# EAGLE board limitSwitch (EAGLE 9.1.3)
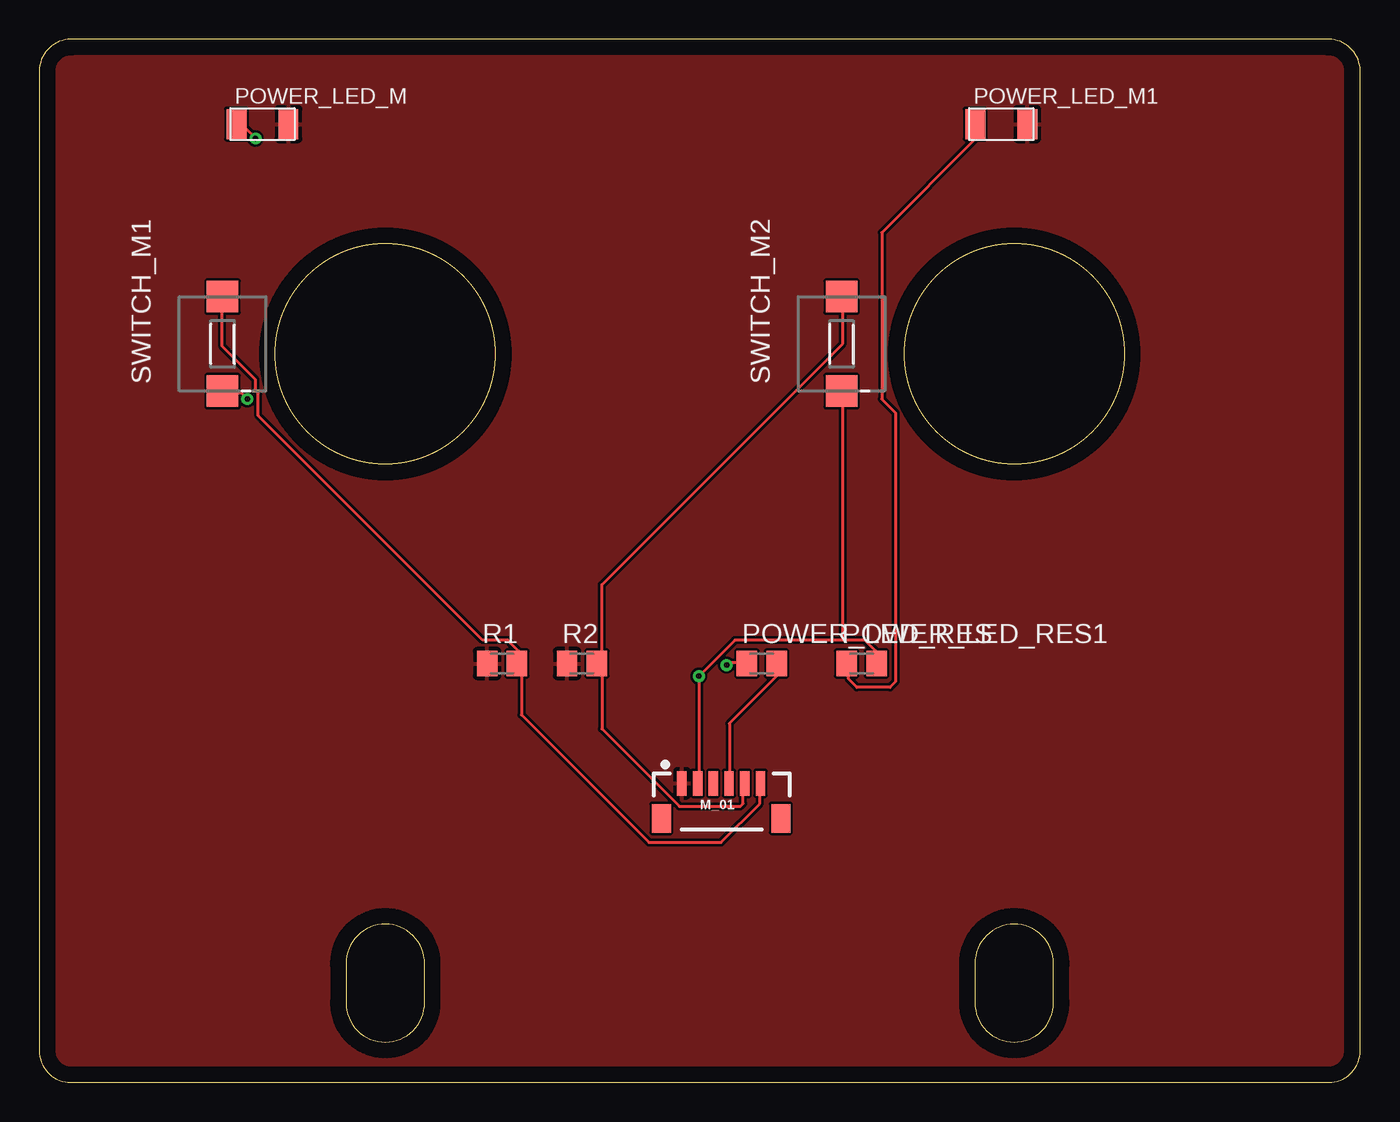
[diagram p0: board, top side]
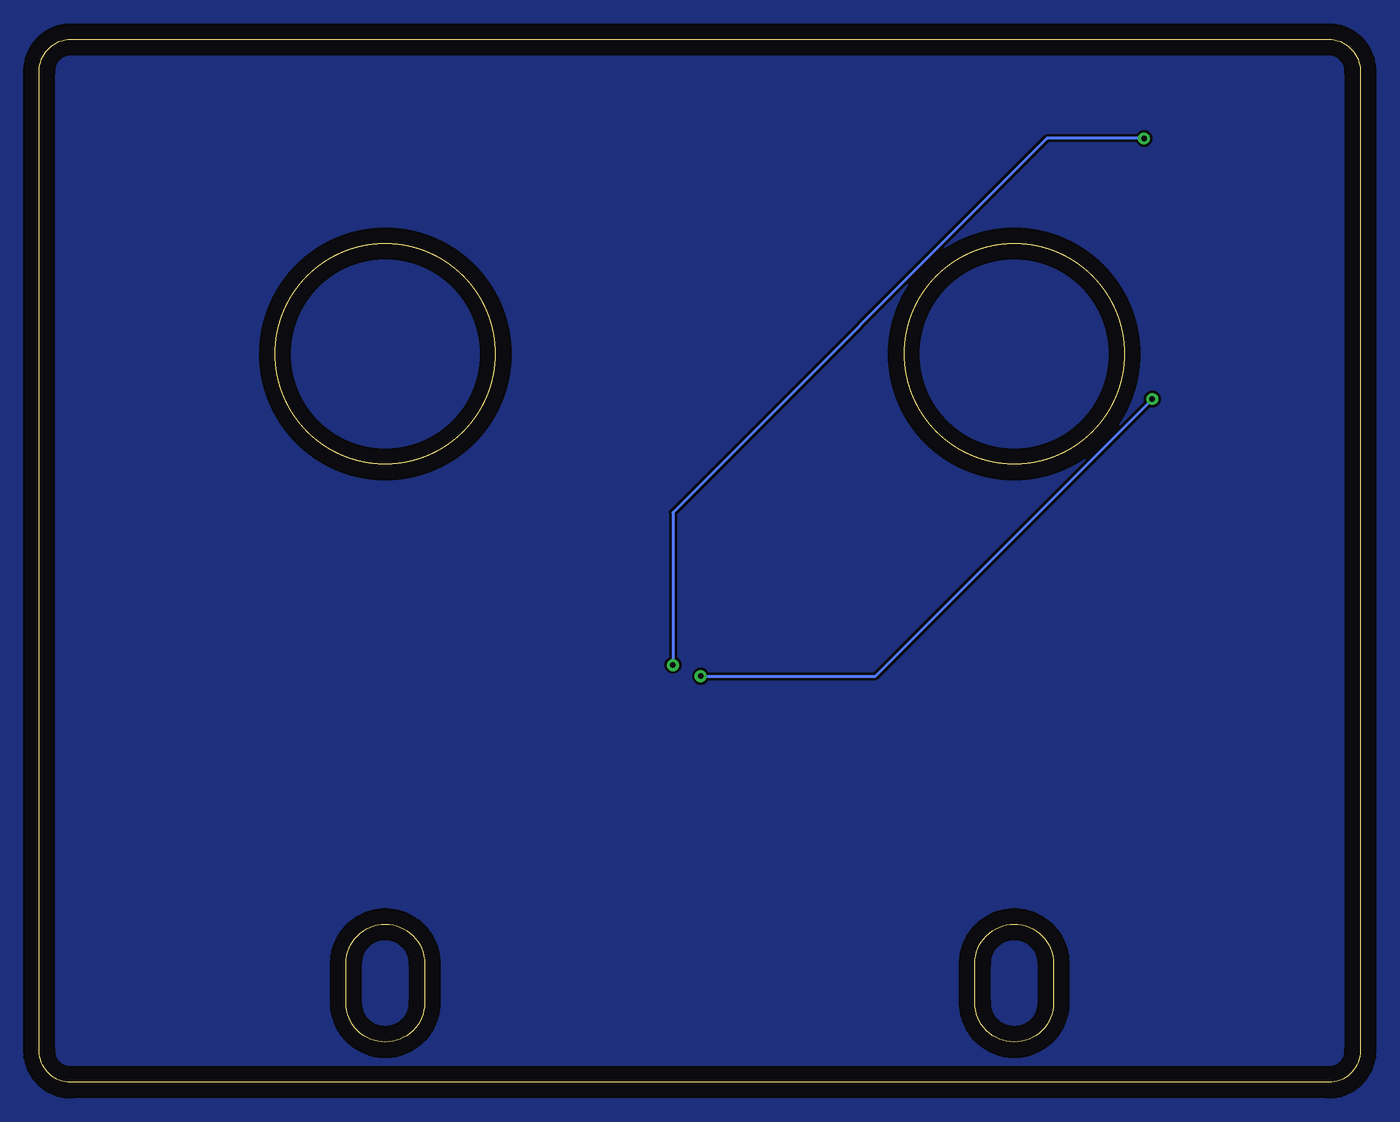
[diagram p1: board, bottom side, seen from below]

Size 84 x 66.31 mm. Coordinates in mm from the lower left corner, seen from the top.
Outline: 84,2 84,64.31 arc90 82,66.31 2,66.31 arc90 0,64.31 0,2 arc90 2,0 82,0 arc90 84,2
Outline: 24.5,5.07 24.5,7.56 arc180 19.5,7.56 19.5,5.07 arc180 24.5,5.07
Outline: 64.5,5.07 64.5,7.56 arc180 59.5,7.56 59.5,5.07 arc180 64.5,5.07
Outline: circle at 22,46.31 radius 7
Outline: circle at 62,46.31 radius 7
Copper layers (1*16): Top 0.035mm / dielectric 1.5mm / Bottom 0.035mm
Design rules "default": minimum track width 6mil, minimum drill 0.35mm, track to track 6mil, track to pad 6mil, pad to pad 6mil, via to via 6mil, smd to smd 6mil, copper to edge 40mil, drill to drill 6mil, minimum pad ring 10mil, minimum via ring 8mil, stop-mask expansion 4mil, vias tented up to drill 0mil, thermal gap 10mil
Net classes: 0 default: width 0.2 mm, clearance 0.12 mm

## Footprints (pad centres in the part's own frame; a part is rotated, then mirrored left to right if it is on the bottom)
1X06-1MM = smd 0.6 x 1.55: 1 -2.54,1.27; 2 -1.54,1.27; 3 -0.54,1.27; 4 0.46,1.27; 5 1.46,1.27; 6 2.46,1.27 | smd 1.2 x 1.8: P$1 -3.84,-0.955; P$2 3.76,-0.955
LED1206FAB = smd 1.27 x 1.905: 1 -1.651,0; 2 1.651,0
M0805 = smd 1.3 x 1.6: 1 -0.95,0; 2 0.95,0
DTSM-3 = smd 2 x 2: 1 -3,0; 2 3,0

## Placement (x,y rotation side)
M_01  [1X06-1MM]  43.4,17.75 0 top
POWER_LED_M  LEDFAB1206  [LED1206FAB]  14.19,60.92 0 top
POWER_LED_M1  LEDFAB1206  [LED1206FAB]  61.18,60.92 0 top
POWER_LED_RES  500  [M0805]  45.94,26.64 0 top
POWER_LED_RES1  500  [M0805]  52.29,26.64 0 top
R1  10k  [M0805]  29.43,26.64 0 top
R2  10k  [M0805]  34.51,26.64 0 top
SWITCH_M1  DTSM-3  [DTSM-3]  11.65,46.95 90 top
SWITCH_M2  DTSM-3  [DTSM-3]  51.02,46.95 90 top

## Library data of the parts
M_01 = SparkFun-Connectors; PROD_ID: CONN-08249; SF_ID: GPS-00579
POWER_LED_M POWER_LED_M1 = fab
POWER_LED_RES POWER_LED_RES1 R1 R2 = resistor
SWITCH_M1 SWITCH_M2 = switch-tact

## Nets
GND_MCU: M_01.1 POWER_LED_M1.2 POWER_LED_M.2 R1.1 R2.1
LED_IN: M_01.4 POWER_LED_RES.2
N$1: POWER_LED_M1.1 POWER_LED_RES1.1
N$11: POWER_LED_M.1 POWER_LED_RES.1
NEO_PIXEL: M_01.3
SWITCH_01: M_01.6 R1.2 SWITCH_M1.2
SWITCH_02: M_01.5 R2.2 SWITCH_M2.2
VCC_MCU: M_01.2 POWER_LED_RES1.2 SWITCH_M1.1 SWITCH_M2.1

## Tracks (layer width: path | path; a pad name or v marks a point on that pad's centre or on a via)
GND_MCU
  pour Top: -6.13,73.62 90.39,73.62 90.39,-5.12 -6.13,-5.12
  pour Bottom: -6.13,71.08 86.58,71.08 86.58,-2.58 -6.13,-2.58
LED_IN
  Top 0.2: M_01.4 43.88,19.13 43.88,22.83 46.88,25.83 46.88,26.54 POWER_LED_RES.2
N$1
  Top 0.2: POWER_LED_RES1.1 51.46,26.54 51.46,25.65 51.99,25.12 54.1,25.12 54.45,25.48 54.45,42.57 53.57,43.45 53.57,54.02 59.56,60.01 59.56,60.89 POWER_LED_M1.1
N$11  (via drill 0.35)
  Top 0.2: v43.71,26.54 43.88,26.71 44.94,26.71 POWER_LED_RES.1 | v13.75,60.01 12.69,61.07 POWER_LED_M.1
  Bottom 0.2: v43.71,26.54 43.71,36.23 19.92,60.01 v13.75,60.01
SWITCH_01
  Top 0.2: M_01.6 45.82,18.96 45.82,17.73 43.35,15.26 38.77,15.26 30.67,23.36 30.67,26.36 30.49,26.54 R1.2 30.49,26.71 30.49,27.42 29.79,28.12 28.2,28.12 13.93,42.39 13.93,43.8 13.75,43.98 13.75,44.68 11.64,46.8 11.64,49.79 SWITCH_M1.2
SWITCH_02
  Top 0.2: M_01.5 44.76,18.96 44.76,17.73 44.59,17.55 40.71,17.55 35.78,22.48 35.78,26.36 35.6,26.54 R2.2 35.6,26.71 35.78,26.89 35.78,31.64 51.11,46.97 51.11,49.79 SWITCH_M2.2
VCC_MCU  (via drill 0.35)
  Top 0.2: 51.11,28.12 52.52,28.12 53.22,27.42 53.22,26.71 POWER_LED_RES1.2 | 51.11,28.12 44.23,28.12 v41.94,25.83 41.94,19.13 M_01.2 | v13.22,43.45 12.87,43.8 11.81,43.8 SWITCH_M1.1 | 51.11,28.12 51.11,43.8 SWITCH_M2.1
  Bottom 0.2: v13.22,43.45 30.84,25.83 v41.94,25.83